# Altium PCB Pour Over 1 Final.PcbDoc
Units mil, origin at the board's own origin, x right, y up, seen from the top; angles counter-clockwise.
Board outline 6000 x 4000 mil, 4 copper layers (Top Layer, Mid Layer 1, Mid Layer 2, Bottom Layer), stack 23.756 mil thick; 46 components, 32 nets, 189 pads, 12 vias.
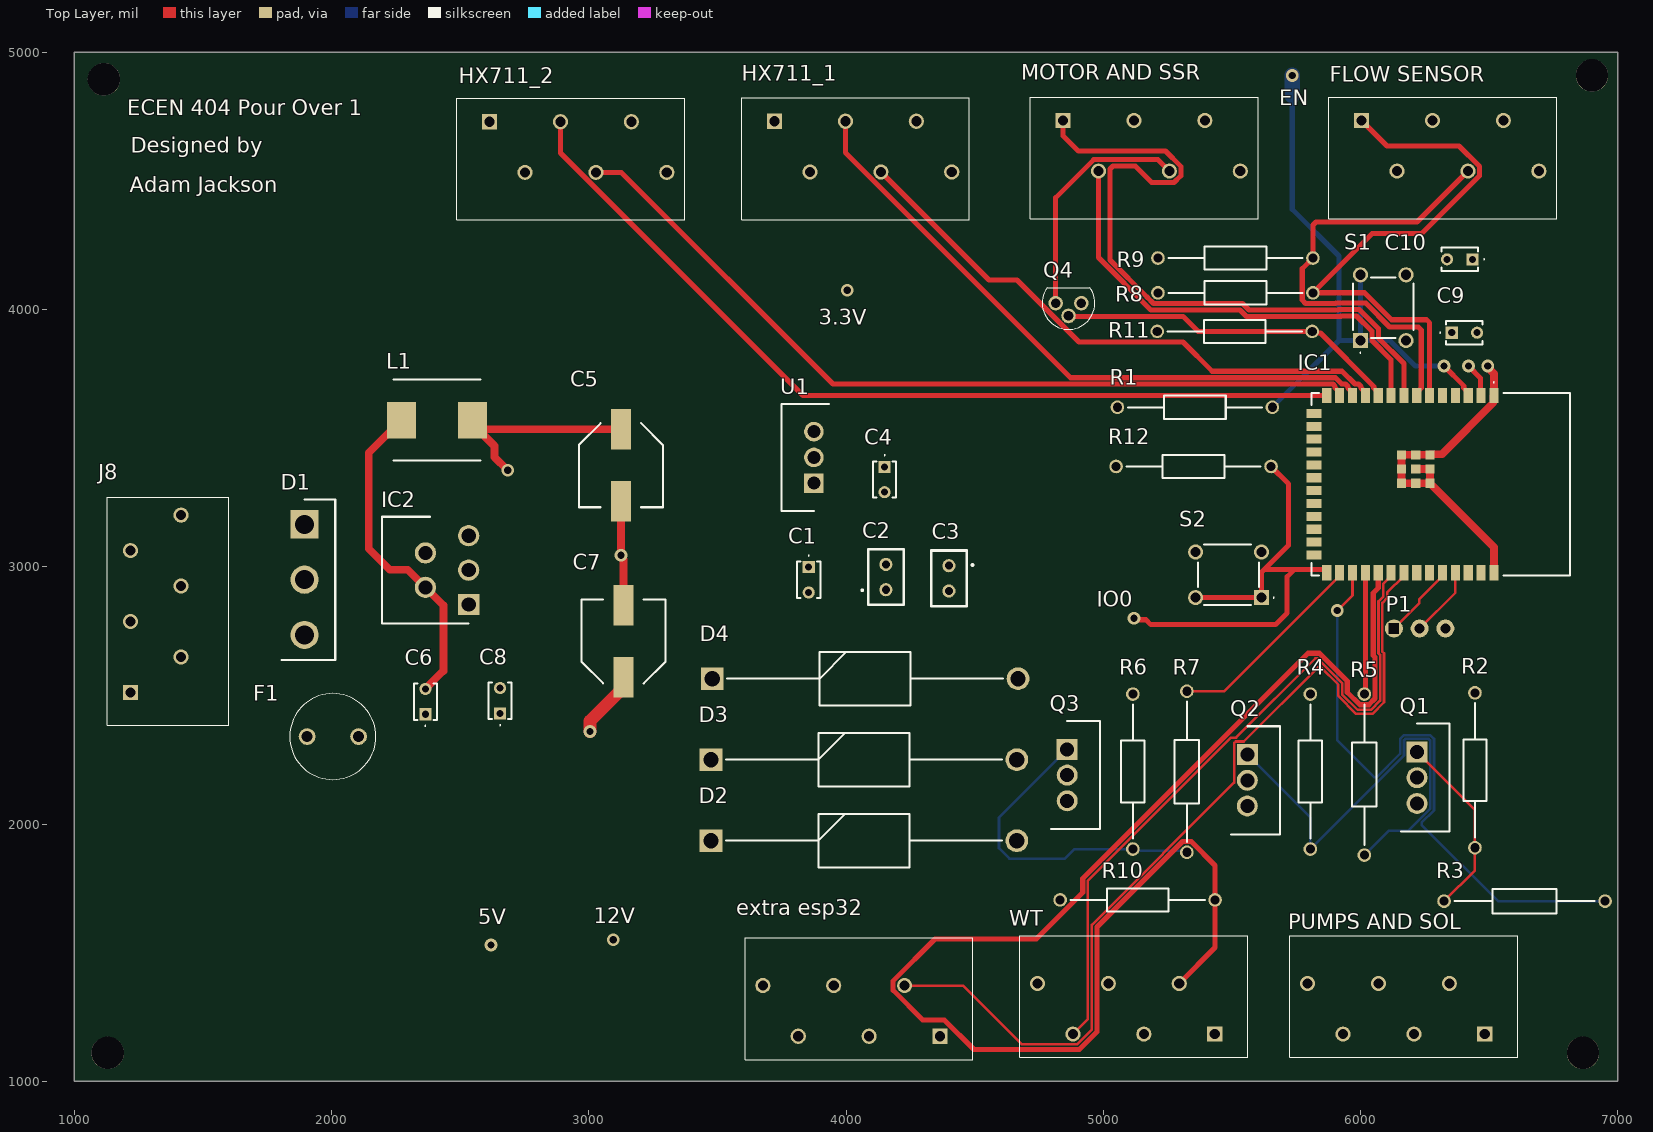
[diagram p0: Top Layer view]
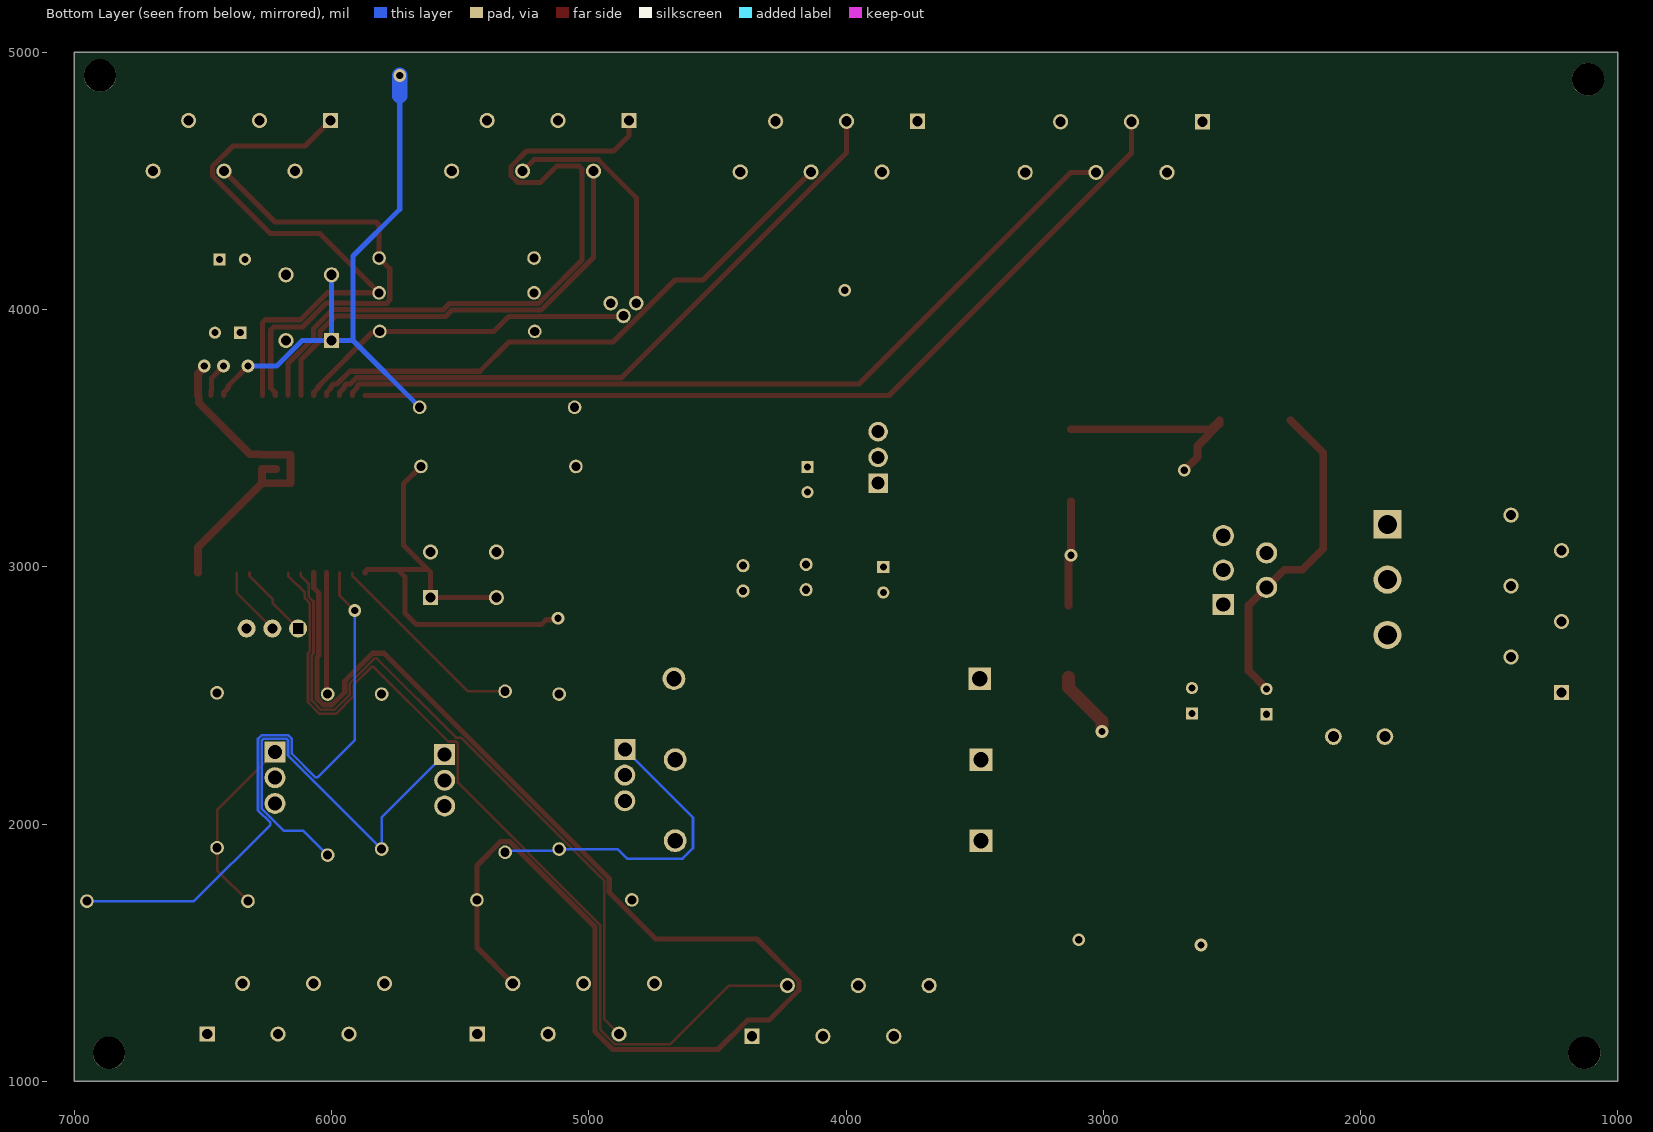
[diagram p1: Bottom Layer view, seen from below]
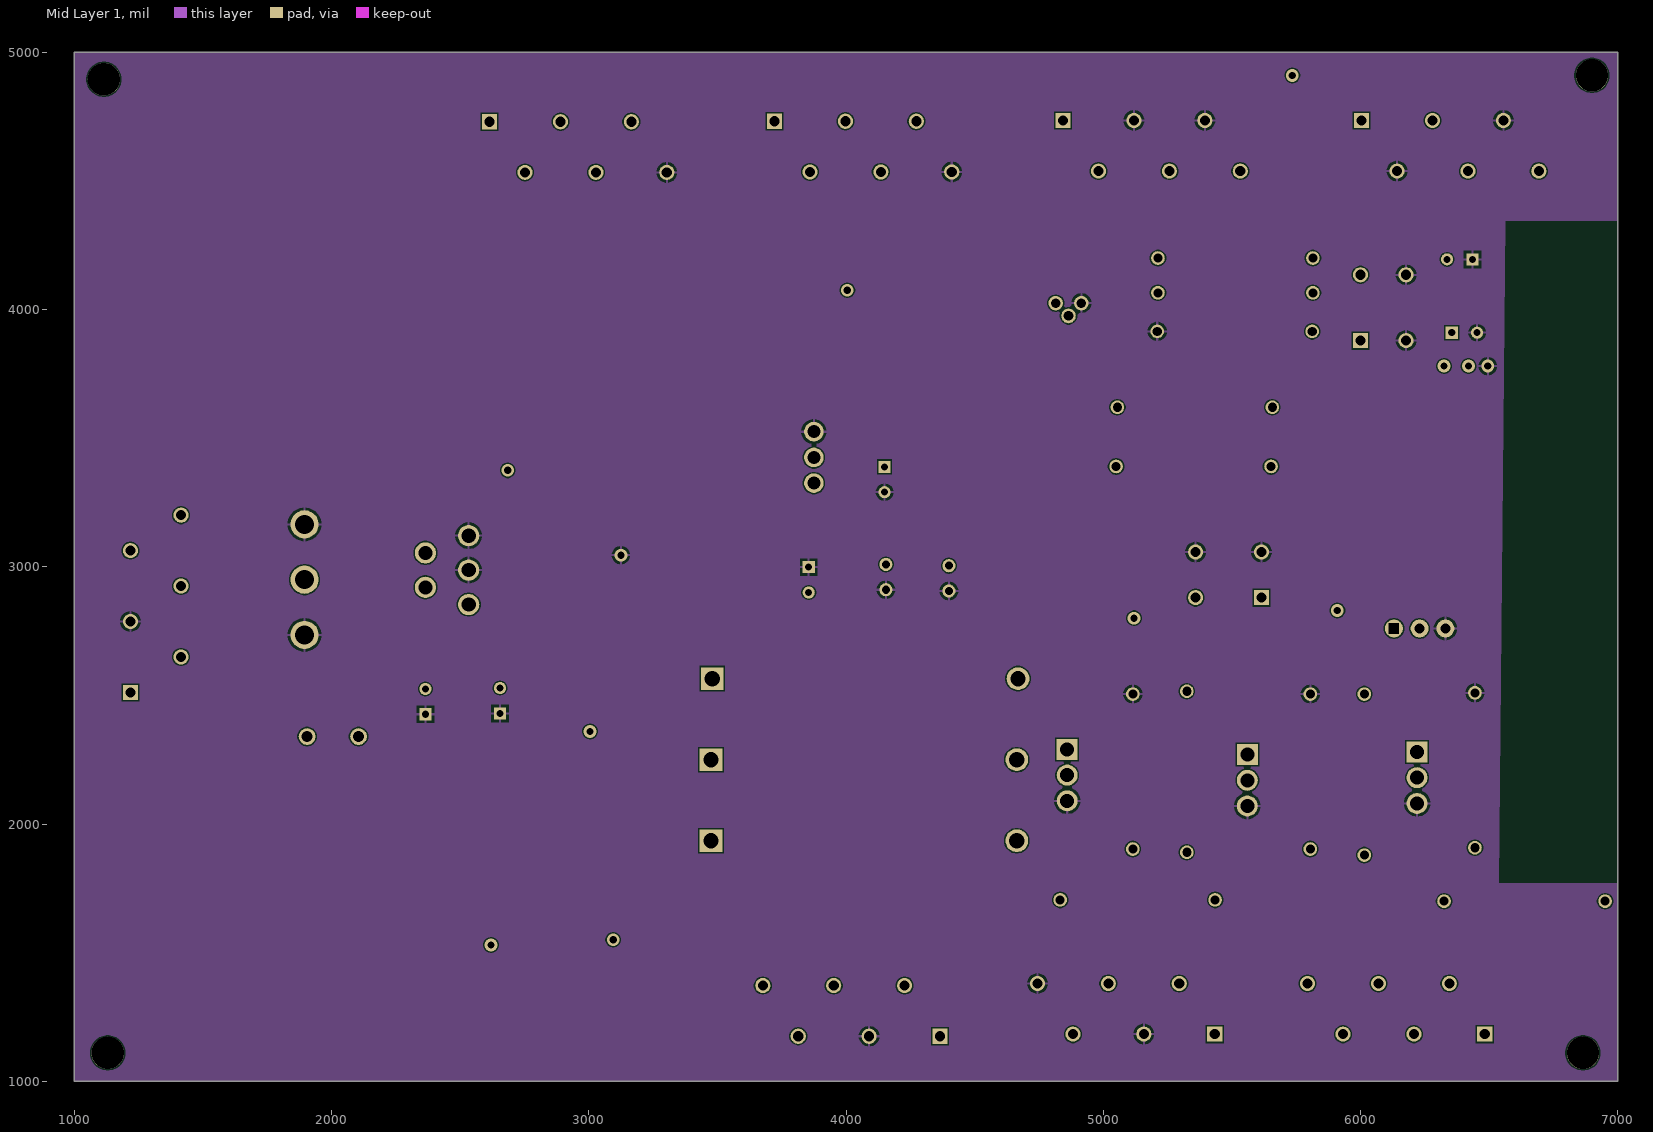
[diagram p2: Mid Layer 1]
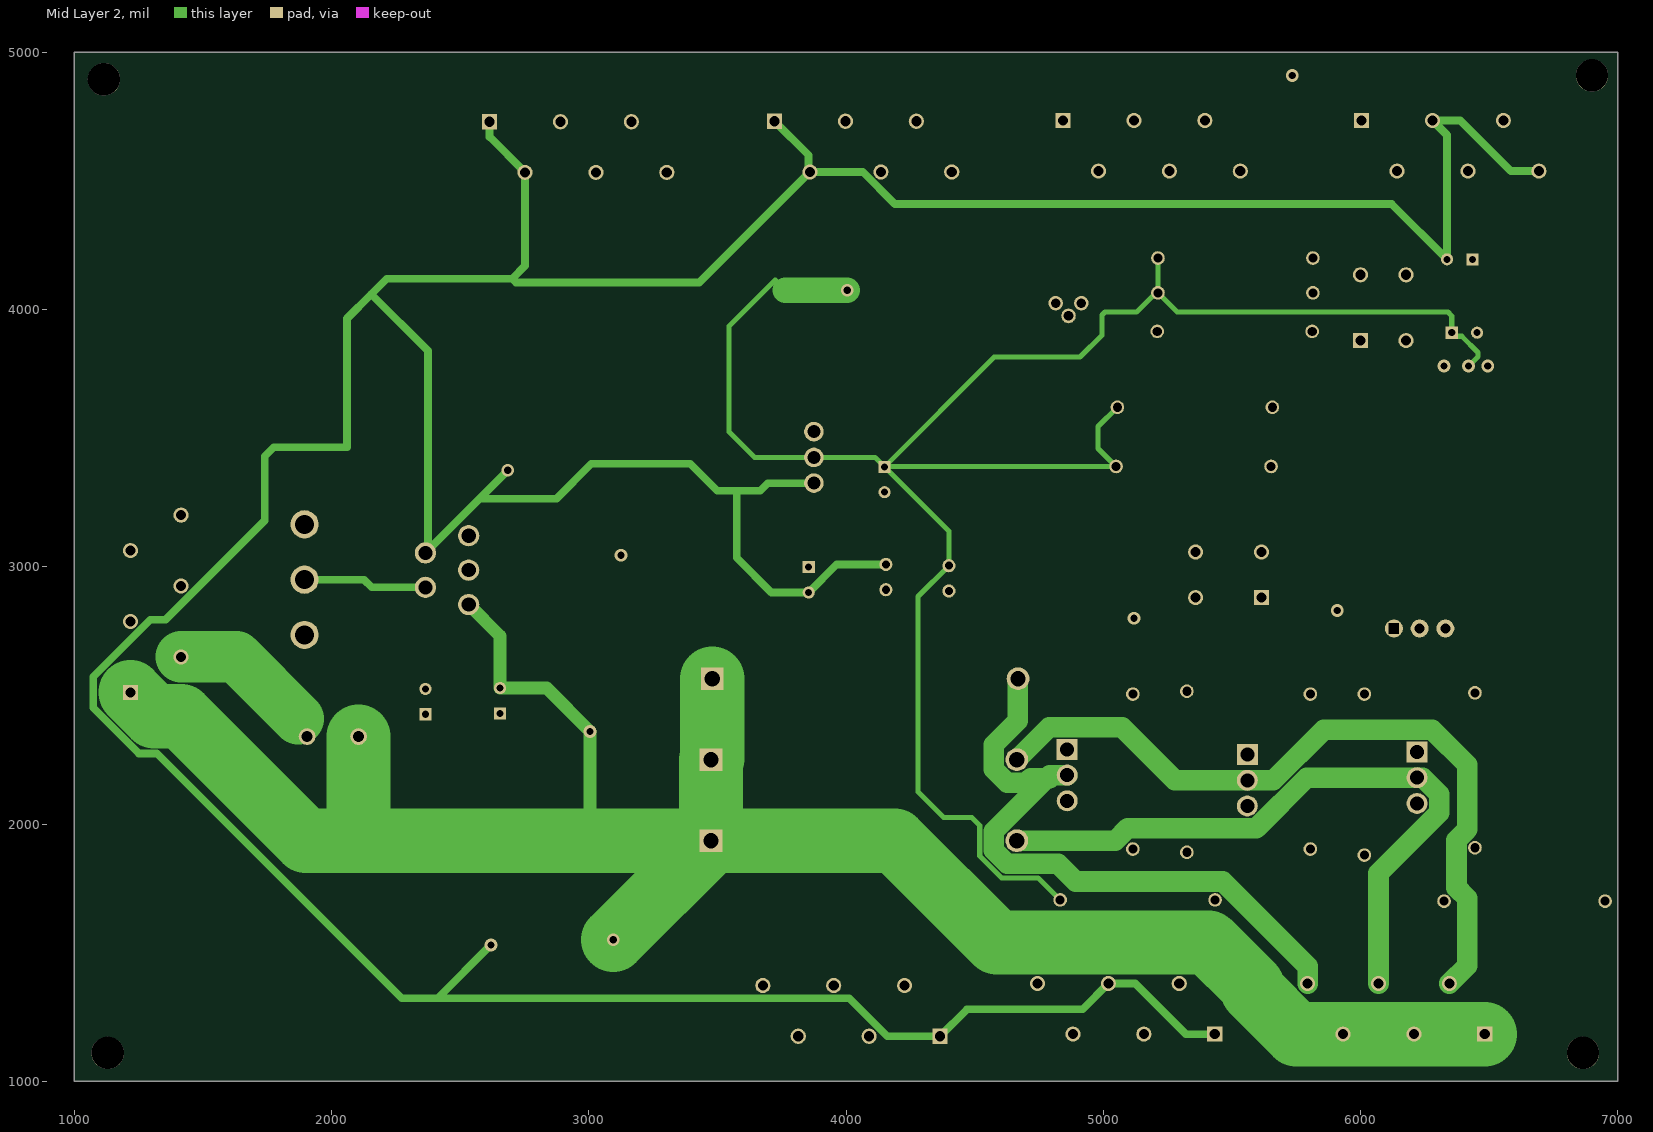
[diagram p3: Mid Layer 2]
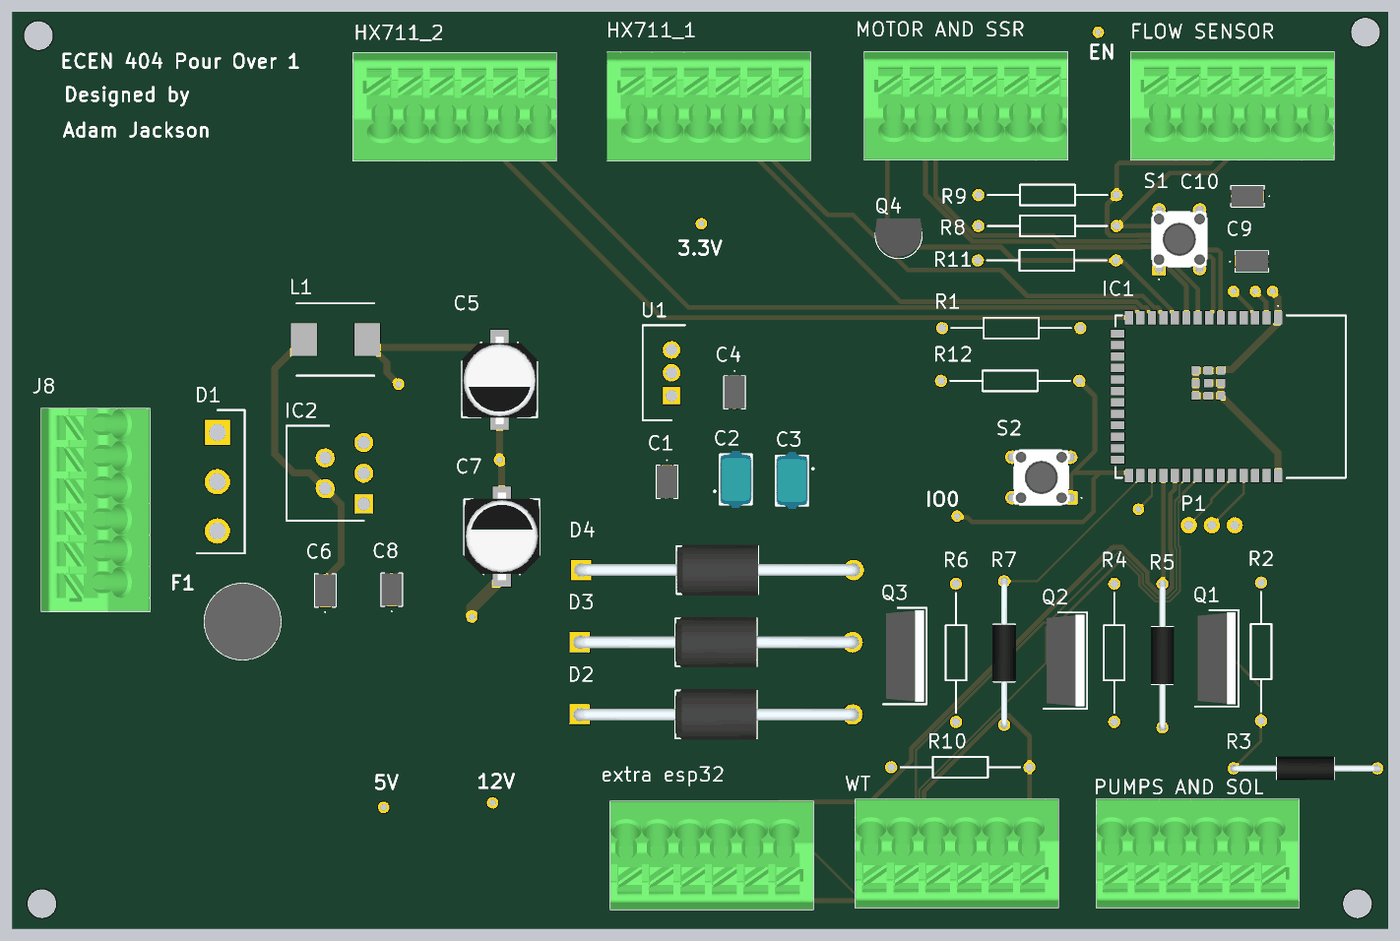
[diagram p4: 3D render of the assembled board from above, using the file's embedded part models]

## Layer stack, top to bottom
Top Solder: solder mask 0.4, Solder Resist, Dk 3.5
Top Layer: signal copper 1.4
Dielectric 2: prepreg 2.8, PP-006, Dk 4.1
Mid Layer 1: signal copper 1.378
Dielectric 1: dielectric 12.6, FR-4, Dk 4.8
Mid Layer 2: signal copper 1.378
Dielectric 3: prepreg 2.8, PP-006, Dk 4.1
Bottom Layer: signal copper 1.4
Bottom Solder: solder mask 0.4, Solder Resist, Dk 3.5

## Board outline
1000,1000 7000,1000 7000,5000 1000,5000

## Design rules (kind name [scope] priority, off if disabled: settings)
Clearance [All] p1: gap=5 ignorepadtopadclearanceinfootprint=FALSE
HoleSize [All] p1: absolutevalues=TRUE maxlimit=200 minlimit=1 maxpercent=80.000 minpercent=20.000
MinimumSolderMaskSliver [All] p1: minsoldermaskwidth=4
PolygonConnect [All] p1: connectstyle=Relief reliefconductorwidth=10 reliefentries=4 polygonreliefangle="90 Angle" airgapwidth=10
RoutingVias [All] p1: holewidth=28 width=50 viastyle="Through Hole" minholewidth=28 minwidth=50 maxholewidth=28 maxwidth=50
SilkToSolderMaskClearance [IsPad] p1: minsilkscreentomaskgap=2.01 clearancetoexposedcopper=TRUE
SolderMaskExpansion [All] p1: expansion=4 istentingtop=FALSE
SupplyNets "Schematic Supply Nets" [InNet('GND')] p1: voltage=0.000
Width [All] p1: maxlimit=250 minlimit=10 preferedwidth=10 minimp=50.000000 maximp=50.000000 favimp=50.000000
27 further rules are at their usual default settings.

## Components (designator, comment, footprint, x,y, rotation, side; value= is the part's Value field where it differs from the comment)
C1 "0.1 uF" K104K10X7RF5TL2 3855,2998.43 r270 top
C2 "10 uF" FG16 4155,2960 r90 top
C3 "10 uF" FG16 4400,2955 r270 top
C4 "0.1 uF" K104K10X7RF5TL2 4150,3388.43 r270 top
C5 "220 uF" EEHZT1E331UP 3125,3394.76 r270 top
C6 "0.1 uF" K104K10X7RF5TL2 2365,2426.57 r90 top
C7 "220 uF" EEHZT1E331UP 3135,2710 r90 top
C8 "0.1 uF" K104K10X7RF5TL2 2655,2430 r90 top
C9 "0.1 uF" K104K10X7RF5TL2 6355,3910 r0 top
C10 "0.1 uF" K104K10X7RF5TL2 6435,4195 r180 top
D1 "VS-40CPQ045-N3" TO546P531X1558X2499-3P 1895,3164.96 r270 top
D2 "1N5408" DIOAD3020W130L900D530 3475,1935 r0 top
D3 "1N5408" DIOAD3020W130L900D530 3475,2250 r0 top
D4 "1N5408" DIOAD3020W130L900D530 3480,2565 r0 top
"extra esp32" "1985234" 1985234 4365.59,1175 r180 top (schematic designator J7)
F1 "37214000411" 37214000411 1905,2340 r0 top
"FLOW SENSOR" "1985234" 1985234 6004.41,4735 r0 top (schematic designator J1)
HX711_1 "1985234" 1985234 3722.2,4731.85 r0 top (schematic designator J3)
HX711_2 "1985234" 1985234 2614.41,4730 r0 top (schematic designator J4)
IC1 "ESP32-S3-WROOM-1-N4" ESP32S3WROOM1N4 6302.01,3320.94 r270 top
IC2 "LM2596T-5.0_LF03" TO170P470X1028X2142-5P 2533.11,2853.07 r90 top
J8 "1985234" 1985234 1218.15,2511.61 r90 top
L1 "33 uH" INDPM8680X400N 2410,3570 r0 top
"MOTOR AND SSR" "1985234" 1985234 4843.82,4735 r0 top (schematic designator J2)
P1 "PREC003SAAN-RC" CONNECTOR 6230,2760 r0 top
"PUMPS AND SOL" "1985234" 1985234 6483.39,1183.15 r180 top (schematic designator J5)
Q1 "IRLB4132PBF" TO254P483X1016X1994-3P 6220,2280 r270 top
Q2 "IRLB4132PBF" TO254P483X1016X1994-3P 5560,2270 r270 top
Q3 "IRLB4132PBF" TO254P483X1016X1994-3P 4860,2290 r270 top
Q4 "2N7000" TO-92_(TO-226) 4915,4025 r0 top
R1 "4.7k" RESAD1526W69L610D229 5657.36,3620 r180 top
R2 "4.7k" RESAD1526W69L610D229 6445,2510 r270 top
R3 "100 ohm" RESAD1590W70L630D240 6950.98,1700 r180 top
R4 "4.7k" RESAD1526W69L610D229 5805,2505 r270 top
R5 "100 ohm" RESAD1590W70L630D240 6015,2505 r270 top
R6 "4.7k" RESAD1526W69L610D229 5115,2505 r270 top
R7 "100 ohm" RESAD1590W70L630D240 5325,2515.98 r270 top
R8 "4.7k" RESAD1526W69L610D229 5815,4065 r180 top
R9 "4.7k" RESAD1526W69L610D229 5815,4200 r180 top
R10 "4.7k" RESAD1526W69L610D229 5435,1705 r180 top
R11 "4.7k" RESAD1526W69L610D229 5812.36,3915 r180 top
R12 "4.7k" RESAD1526W69L610D229 5652.36,3390 r180 top
S1 "TS02-66-60-BK-260-SCR-D" TS026660BK260SCRD 6000,3879.09 r90 top
S2 "TS02-66-60-BK-260-SCR-D" TS026660BK260SCRD 5615,2880 r180 top
U1 "LMS1585ACT-3.3_NOPB" TO254P470X1028X1955-3P 3875,3325 r90 top
WT "1985234" 1985234 5433.39,1183.15 r180 top (schematic designator J6)

## Footprints (in the part's own frame and the unit in brackets; to place one, negate y for a bottom-side part, rotate by r counter-clockwise, add the part's x,y. Pads: shape width x height; smd on the part's side, far side on the other; paste and mask are expansions set on the pad)
1985234 [mm]
  rect 1.5x1.5 hole 1: 1(0,0)
  round 1.5 hole 1: 2(3.5,-5) 3(7,0) 4(10.5,-5) 5(14,0) 6(17.5,-5)
  silkscreen extent -3.25,-9.7 19.25,2.3, body extent -3.25,-9.7 19.25,2.3, height 13.1
37214000411 [mm]
  round 1.65 hole 1.1: 1(0,0) 2(5.08,0)
  silkscreen extent -1.71,-4.25 6.79,4.25, body extent -1.71,-4.24 6.79,4.24, height 8.1
CONNECTOR [mm]
  round 1.78 hole 1 square: 1(-2.54,0)
  round 1.78 hole 1: 2(0,0) 3(2.54,0)
DIOAD3020W130L900D530 [mm]
  rect 2.25x2.25 hole 1.5: 1(0,0)
  round 2.25 hole 1.5: 2(30.2,0)
  silkscreen extent 1.48,-2.65 28.72,2.65, body extent -0.65,-2.79 30.85,2.79, height 5.6
EEHZT1E331UP [mm]
  rect 4x2 smd: 1(-3.55,0) 2(3.55,0)
  silkscreen extent -4.15,-4.15 4.15,4.15, body extent -4.79,-4.15 4.91,4.15, height 10.2
ESP32S3WROOM1N4 [mm]
  rect 1.5x0.9 smd: 1(-8.75,5.51) 2(-8.75,4.24) 3(-8.75,2.97) 4(-8.75,1.7) 5(-8.75,0.43) 6(-8.75,-0.84) 7(-8.75,-2.11) 8(-8.75,-3.38) 9(-8.75,-4.65) 10(-8.75,-5.92) 11(-8.75,-7.19) 12(-8.75,-8.46) 13(-8.75,-9.73) 14(-8.75,-11) 27(8.75,-11) 28(8.75,-9.73) 29(8.75,-8.46) 30(8.75,-7.19) 31(8.75,-5.92) 32(8.75,-4.65) 33(8.75,-3.38) 34(8.75,-2.11) 35(8.75,-0.84) 36(8.75,0.43) 37(8.75,1.7) 38(8.75,2.97) 39(8.75,4.24) 40(8.75,5.51)
  rect 0.9x1.5 smd: 15(-6.985,-12.25) 16(-5.715,-12.25) 17(-4.445,-12.25) 18(-3.175,-12.25) 19(-1.905,-12.25) 20(-0.635,-12.25) 21(0.635,-12.25) 22(1.905,-12.25) 23(3.175,-12.25) 24(4.445,-12.25) 25(5.715,-12.25) 26(6.985,-12.25)
  rect 0.9x0.9 smd: 41(-1.5,-2.21) 42(-0.1,-2.21) 43(-0.1,-0.81) 44(-1.5,-0.81) 45(-2.9,-0.81) 46(-2.9,-2.21) 47(-2.9,-3.61) 48(-1.5,-3.61) 49(-0.1,-3.61)
  silkscreen extent -10.1,-12.5 9,13
FG16 [mm]
  round 1.3 hole 0.8: 1(-1.25,0) 2(1.25,0)
  silkscreen extent -2.75,-1.75 2.75,2.39, body extent -3.16,-1.75 3.16,1.75, height 6.44
INDPM8680X400N [mm]
  rect 2.85x3.6 smd: 1(-3.5,0) 2(3.5,0)
  silkscreen extent -4.3,-4 4.3,4
K104K10X7RF5TL2 [mm]
  rect 1.2x1.2 hole 0.7: 1(0,0)
  round 1.2 hole 0.7: 2(2.5,0)
  silkscreen extent -1.2,-1.15 3.05,1.15, body extent -0.55,-1.15 3.05,1.15, height 5.3
RESAD1526W69L610D229 [mm]
  round 1.35 hole 0.9: 1(0,0) 2(15.3,0)
  silkscreen extent 1.02,-1.14 14.28,1.14
RESAD1590W70L630D240 [mm]
  round 1.35 hole 0.9: 1(0,0) 2(15.9,0)
  silkscreen extent 1.02,-1.2 14.87,1.2, body extent -0.35,-1.29 16.25,1.29, height 2.6
TO170P470X1028X2142-5P [mm]
  rect 2.1x2.1 / inner round 2.1 / far side rect 2.1x2.1 hole 1.4: 1(0,0)
  round 2.1 hole 1.4: 2(1.7,4.27) 3(3.4,0) 4(5.1,4.27) 5(6.8,0)
  silkscreen extent -1.87,0 8.67,8.53
TO254P470X1028X1955-3P [mm]
  rect 1.935x1.935 / inner round 1.935 / far side rect 1.935x1.935 hole 1.29: 1(0,0)
  round 1.935 hole 1.29: 2(2.54,0) 3(5.08,0)
  silkscreen extent -2.73,-1.5 7.81,3.2
TO254P483X1016X1994-3P [mm]
  rect 2.07x2.07 hole 1.38: 1(0,0)
  round 2.07 hole 1.38: 2(2.54,0) 3(5.08,0)
  silkscreen extent -2.8,-1.61 7.88,3.22, body extent -2.54,-1.28 7.62,2.91, height 20.74
TO546P531X1558X2499-3P [mm]
  rect 2.79x2.79 / inner round 2.79 / far side rect 2.79x2.79 hole 1.86: 1(0,0)
  round 2.79 hole 1.86: 2(5.46,0) 3(10.92,0)
  silkscreen extent -2.47,-2.27 13.39,3.04
TO-92_(TO-226) [mm]
  round 1.44 hole 0.94: 1(0,0) 2(-1.27,-1.27) 3(-2.54,0)
  silkscreen extent -3.87,-2.6 1.33,1.53, body extent -3.87,-2.35 1.33,1.84, height 5.58
TS026660BK260SCRD [mm]
  rect 1.5x1.5 hole 1: 1(0,0)
  round 1.5 hole 1: 2(6.5,0) 3(0,-4.5) 4(6.5,-4.5)
  silkscreen extent -1.25,-5.25 6.25,0.75, body extent -0.35,-5.25 6.85,0.75, height 6.02

## Part data
C1 C4 C6 C8 C9 C10: library part K104K10X7RF5TL2, "Capacitor", Manufacturer_Name=Vishay, Mouser Part Number=594-K104K10X7RF5TL2, Arrow Part Number=K104K10X7RF5TL2, Arrow Price/Stock=https://www.arrow.com/en/products/k104k10x7rf5tl2/vishay?region=nac, Datasheet Link=https://www.vishay.com/docs/45171/kseries.pdf, Height=5.2mm, Manufacturer_Part_Number=K104K10X7RF5TL2, Mouser Price/Stock=https://www.mouser.co.uk/ProductDetail/Vishay-BC-Components/K104K10X7RF5TL2?qs=B4Lc6Tv24tbCh1UvC16VNg%3D%3D
C2 C3: library part FG16X7R1E106KRT06, "Capacitor", Manufacturer_Name=TDK, Mouser Part Number=810-FG16X7R1E106KRT6, Arrow Part Number=FG16X7R1E106KRT06, Arrow Price/Stock=https://www.arrow.com/en/products/fg16x7r1e106krt06/tdk, Datasheet Link=https://product.tdk.com/system/files/dam/doc/product/capacitor/ceramic/lead-mlcc/catalog/leadmlcc_halogenfree_fg_en.pdf, Height=5.5mm, Manufacturer_Part_Number=FG16X7R1E106KRT06, Mouser Price/Stock=https://www.mouser.co.uk/ProductDetail/TDK/FG16X7R1E106KRT06?qs=qf2ddTMq67V1hYQaidv4ew%3D%3D
C5 C7: library part EEE-TP1C221AP, "Capacitor Polarised", Manufacturer_Name=Panasonic, Mouser Part Number=667-EEE-TP1C221AP, Datasheet Link=http://industrial.panasonic.com/cdbs/www-data/pdf/RDE0000/ABA0000C1196.pdf, Height=10.8mm, Manufacturer_Part_Number=EEE-TP1C221AP, Mouser Price/Stock=https://www.mouser.com/Search/Refine.aspx?Keyword=667-EEE-TP1C221AP
D1: "Diode", Manufacturer_Name=Vishay, Mouser Part Number=78-VS-40CPQ045-N3, Datasheet Link=https://www.vishay.com/docs/96456/vs-40cpq-n3series.pdf, Height=5.31mm, Manufacturer_Part_Number=VS-40CPQ045-N3, Mouser Price/Stock=https://www.mouser.com/Search/Refine.aspx?Keyword=78-VS-40CPQ045-N3
D2 D3 D4: "Diode", Manufacturer_Name="HY Electronic", Datasheet Link=http://uk.rs-online.com/web/p/products/9033315, Manufacturer_Part_Number=1N5408
"extra esp32" "FLOW SENSOR" HX711_1 HX711_2 J8 "MOTOR AND SSR" "PUMPS AND SOL" WT: "Connector", Manufacturer_Name="Phoenix Contact", Mouser Part Number=651-1985234, Arrow Part Number=1985234, Arrow Price/Stock=https://www.arrow.com/en/products/1985234/phoenix-contact.html?utm_currency=USD&region=nac, Datasheet Link=https://www.phoenixcontact.com/en-us/products/printed-circuit-board-terminal-ptsa-15-6-35-z-1985234?type=pdf, Height=13.1mm, Manufacturer_Part_Number=1985234, Mouser Price/Stock=https://www.mouser.co.uk/ProductDetail/Phoenix-Contact/1985234?qs=A%2FKWGUWTCZgjCof%252B1YY92w%3D%3D
F1: "Fuse", Manufacturer_Name=LITTELFUSE, Mouser Part Number=576-37214000411, Arrow Part Number=37214000411, Arrow Price/Stock=https://www.arrow.com/en/products/37214000411/littelfuse.html?utm_currency=USD&region=europe, Datasheet Link=https://componentsearchengine.com/Datasheets/1/37214000411.pdf, Height=8mm, Manufacturer_Part_Number=37214000411, Mouser Price/Stock=https://www.mouser.com/Search/Refine.aspx?Keyword=576-37214000411
IC1: "Integrated Circuit", Manufacturer_Name="Espressif Systems", Mouser Part Number=356-ESP32-S3WROOM1N4, Datasheet Link=https://www.espressif.com/sites/default/files/documentation/esp32-s3-wroom-1_wroom-1u_datasheet_en.pdf, Height=3.25mm, Manufacturer_Part_Number=ESP32-S3-WROOM-1-N4, Mouser Price/Stock=https://www.mouser.co.uk/ProductDetail/Espressif-Systems/ESP32-S3-WROOM-1-N4?qs=Li%252BoUPsLEnsO%2FkiJOUK0FQ%3D%3D
IC2: "Integrated Circuit", Arrow Part Number=LM2596T-5.0/LF03, Manufacturer_Name="Texas Instruments", Mouser Part Number=926-LM2596T-50/LF03, Arrow Price/Stock=https://www.arrow.com/en/products/lm2596t-5.0lf03/texas-instruments?utm_currency=USD&region=nac, Datasheet Link=https://www.ti.com/lit/ds/symlink/lm2596.pdf?ts=1607069798907&ref_url=https%253A%252F%252Fwww.ti.com%252Fstore%252Fti%252Fen%252Fp%252Fproduct%252F%253Fp%253DLM2596T-5.0%252FLF03%2526keyMatch%253DLM2596T-5.0%252FLF03%2526tisearch%253DSearch-EN-everything%, Height=4.7mm, Manufacturer_Part_Number=LM2596T-5.0/LF03, Mouser Price/Stock=https://www.mouser.co.uk/ProductDetail/Texas-Instruments/LM2596T-5.0-LF03?qs=X1J7HmVL2ZG6KM98hB9zGA%3D%3D
L1: library part F1F2-0804-330M, "Inductor", Manufacturer_Name=Bel, Datasheet Link=https://www.mouser.in/datasheet/3/191/1/ds-ST-F1F2-0804-series.pdf, Height=4mm, Manufacturer_Part_Number=F1F2-0804-330M
P1: "ESP32 USB Connector"
Q1 Q2 Q3: "MOSFET (N-Channel)", Manufacturer_Name=Infineon, Mouser Part Number=942-IRLB4132PBF, Arrow Part Number=IRLB4132PBF, Arrow Price/Stock=https://www.arrow.com/en/products/irlb4132pbf/infineon-technologies-ag.html?utm_currency=USD&region=nac, Datasheet Link=https://4donline.ihs.com/images/VipMasterIC/IC/INFN/INFN-S-A0008993592/INFN-S-A0008993592-1.pdf?hkey=6D3A4C79FDBF58556ACFDE234799DDF0, Height=4.83mm, Manufacturer_Part_Number=IRLB4132PBF, Mouser Price/Stock=https://www.mouser.co.uk/ProductDetail/Infineon-Technologies/IRLB4132PBF?qs=7jf4hlN%252BSJAw3gjmC05T%2Fw%3D%3D
Q4: "MOSFET (N-Channel)", Manufacturer_Name=onsemi, Mouser Part Number=512-2N7000, Arrow Part Number=2N7000, Arrow Price/Stock=https://www.arrow.com/en/products/2n7000/on-semiconductor.html?utm_currency=USD&region=europe, Datasheet Link=https://www.onsemi.com/pub/Collateral/NDS7002A-D.PDF, Height=5.33mm, Manufacturer_Part_Number=2N7000, Mouser Price/Stock=https://www.mouser.co.uk/ProductDetail/onsemi-Fairchild/2N7000?qs=FOlmdCx%252BAA2o%2FKZOTk%2F3hg%3D%3D
R1 R2 R4 R6 R8 R9 R10 R11 R12: library part RN55E4701BRE6, "Resistor", Manufacturer_Name=Vishay, Datasheet Link=https://www.vishay.com/docs/31027/cmfmil.pdf, Manufacturer_Part_Number=RN55E4701BRE6
R3 R5 R7: library part MFP-25BRD52-100R, "Resistor", Manufacturer_Name="Yageo Group", Mouser Part Number=603-MFP-25BRD52-100R, Arrow Part Number=MFP-25BRD52-100R, Arrow Price/Stock=https://www.arrow.com/en/products/mfp-25brd52-100r/yageo, Datasheet Link=https://www.yageo.com/upload/media/product/productsearch/datasheet/lr/YAGEO%20MFP_datasheet_2021v0.pdf, Manufacturer_Part_Number=MFP-25BRD52-100R, Mouser Price/Stock=https://www.mouser.co.uk/ProductDetail/YAGEO/MFP-25BRD52-100R?qs=lfEcNZWccVkSKxBYlhOoug%3D%3D
S1 S2: "Switch", Manufacturer_Name="Same Sky", Mouser Part Number=179-TS026660BK260SCR, Arrow Part Number=TS02-66-60-BK-260-SCR-D, Arrow Price/Stock=https://www.arrow.com/en/products/ts02-66-60-bk-260-scr-d/cui-devices?region=nac, Datasheet Link=https://www.sameskydevices.com/product/resource/ts02.pdf, Height=6.2mm, Manufacturer_Part_Number=TS02-66-60-BK-260-SCR-D, Mouser Price/Stock=https://www.mouser.co.uk/ProductDetail/CUI-Devices/TS02-66-60-BK-260-SCR-D?qs=A6eO%252BMLsxmSDYX3TQ5KZSA%3D%3D
U1: "Undefined or Miscellaneous", Arrow Part Number=LMS1585ACT-3.3/NOPB, Manufacturer_Name="Texas Instruments", Mouser Part Number=926-LMS1585ACT33NOPB, Arrow Price/Stock=https://www.arrow.com/en/products/lms1585act-3.3nopb/texas-instruments?region=nac, Datasheet Link=http://www.ti.com/lit/gpn/lms1585a, Height=4.7mm, Manufacturer_Part_Number=LMS1585ACT-3.3/NOPB, Mouser Price/Stock=https://www.mouser.co.uk/ProductDetail/Texas-Instruments/LMS1585ACT-3.3-NOPB?qs=7lkVKPoqpbYfezQINhjreg%3D%3D

## Free pads (board coordinates)
  round 126 hole 126 unplated: MOUNT1(1115,4895) MOUNT2(6900,4910) MOUNT3(1130,1110) MOUNT4(6865,1110)

## Via types
v1: diameter 50, hole 28, Top Layer to Bottom Layer, 12 vias

## Nets (pads, with @x,y where several pads share a name; then routed paths per layer and width w, separated by ;. In a path a pad name is that pad's centre, name@x,y a point inside that pad or via, vN(x,y) a via of type N, cw(c..) or ccw(c..) an arc to the next point about the centre after c; other vN are vias at no path point)
12_IN: "PUMPS AND SOL.1" "PUMPS AND SOL.3" "PUMPS AND SOL.5" C7.1 C8.2 D2.1 D3.1 D4.1 F1.2 IC2.1 J8.1 | length 8891.8
  Top Layer w50: v1(3005,2360) 3005,2400.87 3135,2530.87 C7.1
  Mid Layer 2 w50: IC2.1 2655,2731.18 C8.2 2836.57,2528.43 v1(3005,2360) 3005,1935
  Mid Layer 2 w250: J8.1 1310.35,2419.41 1415.59,2419.41 1900,1935 2095,1935 ; F1.2 2105,1945 2095,1935 ; v1(3095,1550) 3475,1930 D2.1 ; D4.1 3480,2255 D3.1 D2.1 ; 6483.39,1183.15 6207.8,1183.15 5750.84,1183.15 5580.06,1353.93 5580.06,1368.74 5409.28,1539.53 4585.47,1539.53 4190,1935 D2.1 ; 2095,1935 3005,1935 D2.1
+3.3V: C3.1 C4.1 C9.1 IC1.2 R1.2 R8.2 R9.2 R10.2 R12.2 U1.2 | length 8111.4
  Top Layer w20: v1(6420,3780) 6466.92,3733.08 6466.92,3684.96 6468.94,3682.95 IC1.2
  Mid Layer 2 w20: 3765,4075 3725,4115 3545,3935 3545,3525 3645,3425 U1.2 4113.43,3425 C4.1 ; R10.2 4746.93,1790.71 4604.21,1790.71 4519.69,1875.23 4519.69,1994.51 4489.2,2025 4380,2025 4280,2125 4280,2884.21 C3.1 4400,3138.43 C4.1 ; R1.2 4980,3545 4980,3460 R12.2 5049.21,3389.21 C4.1@4150.79,3389.21 ; R9.2 R8.2 ; C9.1 6355,3975 6340,3990 5287.64,3990 R8.2 ; C9.1@6368.62,3896.38 6393.62,3896.38 6456.72,3833.28 6456.72,3816.72 v1(6420,3780) ; C4.1 C4.1@4150.79,3389.21 ; C4.1@4150.79,3389.21 4576.57,3815 4910,3815 4995,3900 4995,3978.28 5006.72,3990 5130,3990 5205,4065 R8.2
  Mid Layer 2 w100: 3765,4075 v1(4005,4075)
+5V: "extra esp32.1" "FLOW SENSOR.3" "FLOW SENSOR.6" C1.2 C2.2 C5.1 C10.2 HX711_1.1 HX711_1.2 HX711_2.1 HX711_2.2 IC2.4 L1.2 U1.1 WT.1 WT.4 | length 18875.5
  Top Layer w30: v1(2685,3375) 2633.68,3426.32 2633.68,3469.35 2547.8,3555.24 L1.2 2583.27,3534.53 C5.1
  Mid Layer 2 w30: IC2.4 2375,3063.86 IC2.4@2375,3064.43 ; HX711_2.1 2614.41,4670.94 HX711_2.2 2752.2,4169.78 2702.43,4120 ; v1(2620,1530) 2412.32,1322.32 ; v1(2685,3375) 2685,3374.43 2575.29,3264.71 ; HX711_1.1 3854.44,4599.61 3854.44,4540.56 HX711_1.2 ; U1.1 3696.25,3325 3666.25,3295 3575,3295 ; C2.2 3964.21,3009.21 C1.2 3710,2900 3575,3035 3575,3295 ; WT.1 5321.79,1183.15 5124.94,1380 WT.4 4920,1280 4470.59,1280 4365.59,1175 4160.04,1175 4012.72,1322.32 2412.32,1322.32 ; 6693.39,4538.15 6585.12,4538.15 6388.27,4735 6280,4735 6336.57,4678.43 C10.2 6121.57,4410 4190.55,4410 4065.55,4535 HX711_1.2 ; 2155,4060 2375,3840 IC2.4@2375,3064.43 ; 2155,4060 2060,3965 2060,3465 1775,3465 1740,3430 1740,3179.96 1354.45,2794.41 1295.88,2794.41 1073.15,2571.68 1073.15,2451.55 1250.29,2274.41 1321,2274.41 2273.09,1322.32 2412.32,1322.32 ; 2155,4060 2215,4120 2702.43,4120 ; IC2.4@2375,3064.43 2575.29,3264.71 ; 2575.29,3264.71 2874.71,3264.71 3010,3400 3395,3400 3500,3295 3575,3295 ; 2702.43,4120 2717.43,4105 3430,4105 HX711_1.2
FLOW1: "FLOW SENSOR.1" IC1.6 R8.1 | length 2189.5
  Top Layer w20: 6004.41,4735 6103.38,4636.03 6382.88,4636.03 6462.32,4556.59 6462.32,4519.71 6238.14,4295.52 6045.52,4295.52 R8.1 6015.71,4065 6120.71,3960 6257.22,3960 6268.94,3948.28 IC1.6
FLOW2: "FLOW SENSOR.4" IC1.7 R9.1 | length 1773
  Top Layer w20: IC1.7 6218.94,3677.24 6236.22,3694.53 6236.22,3920.51 6224.5,3932.22 6113.13,3932.22 6020.36,4025 5904.32,4025 5902.75,4023.43 5786.72,4023.43 5773.43,4036.72 5773.43,4158.43 R9.1 5815,4328.28 5826.72,4340 6219.65,4340 6417.8,4538.15
GND: "extra esp32.3" "FLOW SENSOR.2" "FLOW SENSOR.5" "MOTOR AND SSR.3" "MOTOR AND SSR.5" C1.1 C2.1 C3.2 C4.2 C5.2 C6.1 C7.2 C8.1 C9.2 C10.1 D1.1 D1.3 HX711_1.6 HX711_2.6 IC1.1 IC1.40 IC1.41 IC1.42 IC1.43 IC1.44 IC1.45 IC1.46 IC1.47 IC1.48 IC1.49 IC2.3 IC2.5 J8.3 P1.3 Q1.3 Q2.3 Q3.3 Q4.1 R2.1 R4.1 R6.1 R11.2 S1.3 S1.4 S2.3 S2.4 U1.3 WT.3 WT.6 | length 1785.5
  Top Layer w30: C5.2 v1(3125,3045) 3125,3039.59 3135,3029.59 C7.2 ; IC1.41 IC1.44 IC1.43 ; v1(6495,3780) 6495,3774.59 6518.94,3750.65 IC1.1 6516.22,3662.72 6516.22,3637.19 6316.87,3437.83 6272.83,3437.83 IC1.45 IC1.46 IC1.47 IC1.48 IC1.49 IC1.42 IC1.43 ; IC1.40 6518.94,3076.06 IC1.43
HX711_ADC1: HX711_1.4 IC1.11 | length 2254.3
  Top Layer w20: HX711_1.4 4556.24,4114.35 4664.35,4114.35 4905.27,3873.43 5310.37,3873.43 5423.83,3759.96 5928.22,3759.96 5978.22,3709.96 5992.87,3709.96 6001.65,3701.17 6001.65,3694.53 6018.94,3677.24 IC1.11
HX711_ADC2: HX711_2.4 IC1.13 | length 3261.4
  Top Layer w20: HX711_2.4 3126.12,4533.15 3949.31,3709.96 5892.87,3709.96 5901.65,3701.17 5901.65,3694.53 5918.94,3677.24 IC1.13
HX711_CLK1: HX711_1.3 IC1.12 | length 2495.2
  Top Layer w20: HX711_1.3 3997.8,4609.82 4872.66,3734.96 5903.22,3734.96 5927.13,3711.05 5941.78,3711.05 5951.65,3701.17 5951.65,3694.53 5968.94,3677.24 IC1.12
HX711_CLK2: HX711_2.3 IC1.14 | length 3491.4
  Top Layer w20: HX711_2.3 2890,4607.97 3832.54,3665.43 IC1.14
MOTOR_DIR: "MOTOR AND SSR.1" IC1.8 | length 2731.4
  Top Layer w20: 4843.82,4735 4843.82,4675.47 4903.26,4616.03 5242.29,4616.03 5301.73,4556.59 5301.73,4519.71 5275.65,4493.62 5188.78,4493.62 5124.73,4557.68 5037.86,4557.68 5026.14,4545.96 5026.14,4193.01 5171.06,4048.09 5171.06,4047.78 5195.42,4023.43 5541.76,4023.43 5566.76,3998.43 5913.1,3998.43 5914.68,4000 5995.36,4000 6069.53,3925.83 6069.53,3889.84 6168.94,3790.43 IC1.8
MOTOR_PWM: "MOTOR AND SSR.2" IC1.9 | length 1800
  Top Layer w20: 4981.61,4538.15 4981.61,4201.87 5185.06,3998.43 5531.4,3998.43 5556.4,3973.43 5923.46,3973.43 5925.03,3975 5985,3975 6044.53,3915.47 6044.53,3879.48 6118.94,3805.07 IC1.9
NetC6_2: C6.2 D1.2 IC2.2 L1.1 | length 1770.2
  Top Layer w30: L1.1 2145,3442.8 2145,3070 2226.17,2988.83 2296.17,2988.83 IC2.2 2435,2850 2435,2595 C6.2
  Mid Layer 2 w30: D1.2 2126.31,2950 2156.31,2920 IC2.2
NetF1_1: F1.1 J8.2 | length 554.2
  Mid Layer 2 w200: J8.2 1630.59,2649.41 1870,2410
NetIC1_3: IC1.3 R1.1 S1.1 S1.2 | length 2331.5
  Top Layer w20: v1(6325,3780) 6401.65,3703.35 6401.65,3694.53 6418.94,3677.24 IC1.3
  Bottom Layer w20: R1.1 5916.46,3879.09 ; 5735,4830 5735,4390 5916.46,4208.54 5916.46,3879.09 ; S1.2 S1.1 ; v1(6325,3780) 6213.29,3780 6114.19,3879.09 S1.1 ; 5916.46,3879.09 S1.1
  Bottom Layer w60: 5735,4830 v1(5735,4910)
NetIC1_27: IC1.27 R12.1 S2.1 S2.2 | length 1894.7
  Top Layer w20: v1(5120,2800) 5125.74,2794.26 5165.74,2794.26 5185,2775 5670,2775 5715,2820 5715,2961.03 5743.97,2990 ; S2.2 S2.1 5615,2978.28 5626.72,2990 ; R12.1 5720,3322.36 5720,3083.28 5626.72,2990 ; IC1.27 5868.94,2982.28 5861.22,2990 5743.97,2990 ; 5626.72,2990 5743.97,2990
NetIC1_36: IC1.36 P1.1 | length 294.7
  Top Layer w10: P1.1 6227.92,2857.92 6227.92,2873.63 6318.94,2964.65 IC1.36
NetIC1_37: IC1.37 P1.2 | length 274
  Top Layer w10: P1.2 6368.94,2898.94 IC1.37
NetQ1_1: Q1.1 R2.2 R3.2 | length 722.9
  Top Layer w10: Q1.1 6445,2055 R2.2 6445,1820 R3.2
NetQ2_1: Q2.1 R4.2 R5.2 | length 1744.5
  Bottom Layer w10: Q2.1 5805,2025 R4.2 6169.25,2266.89 6169.25,2324.89 6175.11,2330.75 6264.89,2330.75 6270.75,2324.89 6270.75,2058.98 6184.89,1973.13 6109.11,1973.13 R5.2
NetQ3_1: Q3.1 R6.2 R7.2 | length 1261.3
  Bottom Layer w10: Q3.1 4594.69,2024.68 4594.69,1906.3 4635.27,1865.71 4850.83,1865.71 4887.76,1902.64 R6.2 5121.32,1896.32 5318.68,1896.32 R7.2
PUMP1: IC1.29 R3.1 | length 2409.3
  Top Layer w10: v1(5910,2830) 5968.94,2888.94 IC1.29
  Bottom Layer w10: v1(5910,2830) 5910,2325 6053.93,2181.07 6062.22,2181.07 6154.25,2273.1 6154.25,2331.1 6168.9,2345.75 6271.1,2345.75 6285.75,2331.1 6285.75,2052.77 6238.13,2005.15 6238.13,1996.87 6535,1700 R3.1
PUMP1_OUT: "PUMPS AND SOL.4" D2.2 Q1.2 | length 2603.1
  Mid Layer 2 w80: D2.2 5046.14,1935 5095.39,1984.25 5595.52,1984.25 5791.27,2180 Q1.2 6220.29,2179.71 6241.55,2179.71 6305.75,2115.52 6305.75,2044.48 6070,1808.73 6070,1380
PUMP2: IC1.30 R5.1 | length 473.1
  Top Layer w20: R5.1 6018.94,2508.94 IC1.30
PUMP2_OUT: "PUMPS AND SOL.2" D3.2 Q2.2 | length 2938.9
  Mid Layer 2 w80: D3.2 4789.72,2375.75 5072.95,2375.75 5278.7,2170 Q2.2 5560.29,2170.29 5661.34,2170.29 5856.81,2365.75 6279.39,2365.75 6415,2230.14 6415,1978.86 6373.43,1937.29 6373.43,1752.8 6415,1711.22 6415,1449.41 6345.59,1380
SOL: IC1.28 R7.1 | length 791.6
  Top Layer w10: R7.1 5470.28,2515.98 5918.94,2964.65 IC1.28
SOL_OUT: "PUMPS AND SOL.6" D4.2 Q3.2 | length 2560.4
  Mid Layer 2 w80: D4.2 4667.33,2563.36 4667.33,2401.04 4574.69,2308.39 4574.69,2213.01 4626.99,2160.71 4700.96,2160.71 4717.63,2177.37 4792.41,2177.37 ; Q3.2 4859.71,2189.71 4792.41,2189.71 4574.69,1971.99 4574.69,1898.01 4626.99,1845.71 4824.29,1845.71 4893.43,1776.57 5464.65,1776.57 5794.41,1446.81 5794.41,1380
SSR: IC1.10 Q4.2 R11.1 | length 1343
  Top Layer w20: Q4.2 4866.57,3973.43 5310.74,3973.43 5369.16,3915 R11.1 5818.7,3908.66 5844.17,3908.66 6051.65,3701.17 6051.65,3694.53 6068.94,3677.24 IC1.10
SSR_OUT: "MOTOR AND SSR.4" Q4.3 | length 931.5
  Top Layer w20: Q4.3 4815,4434.51 4963.17,4582.68 5212.68,4582.68 5257.2,4538.15
TEST1: IC1.32 WT.5 | length 2758.2
  Top Layer w10: WT.5 4940.47,1241.42 4940.47,1779.83 5496.39,2335.75 5516.04,2335.75 5824.18,2643.89 5832.47,2643.89 5928.87,2547.49 5928.87,2504.05 5989.49,2443.43 6040.51,2443.43 6076.57,2479.49 6076.57,2656.85 6069.96,2663.46 6069.96,2865.67 6088.94,2884.65 6088.94,2934.65 6118.94,2964.65 IC1.32
TEST2: "extra esp32.2" IC1.33 | length 3554.6
  Top Layer w10: 4227.8,1371.85 4455.71,1371.85 4683.94,1143.62 4898.58,1143.62 4955.47,1200.52 4955.47,1607.55 5509.25,2161.33 5509.25,2314.89 5515.11,2320.75 5546.25,2320.75 5836.18,2610.68 5844.47,2610.68 5913.87,2541.27 5913.87,2497.83 5983.28,2428.43 6046.72,2428.43 6091.57,2473.28 6091.57,2663.06 6084.96,2669.68 6084.96,2859.46 6103.94,2878.43 6103.94,2899.65 6168.94,2964.65 IC1.33
WATER_TEMP: IC1.31 R10.1 WT.2 | length 5562.2
  Top Layer w20: WT.2 5435,1519.41 R10.1 5435,1838.8 5342.22,1931.57 5307.78,1931.57 4975.47,1599.27 4975.47,1192.23 4906.86,1123.62 4497.24,1123.62 4382.34,1238.51 4298.16,1238.51 4183.27,1353.41 4183.27,1390.29 4346.01,1553.03 4739.47,1553.03 4920.47,1734.04 4920.47,1788.12 5796.25,2663.89 5840.75,2663.89 5948.87,2555.77 5948.87,2512.33 5997.78,2463.43 6032.22,2463.43 6056.57,2487.78 6056.57,2648.56 6049.96,2655.18 6049.96,2897.95 6068.94,2916.93 IC1.31
pads on no net: "extra esp32.4" "extra esp32.5" "extra esp32.6" "MOTOR AND SSR.6" HX711_1.5 HX711_2.5 IC1.4 IC1.5 IC1.15 IC1.16 IC1.17 IC1.18 IC1.19 IC1.20 IC1.21 IC1.22 IC1.23 IC1.24 IC1.25 IC1.26 IC1.34 IC1.35 IC1.38 IC1.39 J8.4 J8.5 J8.6

## Polygon pours and split planes (outlines as drawn)
GND on Mid Layer 1 "GND Net" (solid, remove dead copper, pour order 6): 1000,1000 1000,5000 7000,5000 7000,1000

## Other copper
Mid Layer 1:
  pour cut-out: 6537.77,1770 7000,1770 7000,4345 6562.77,4345

## Silkscreen, mask and mechanical layers (free items; w line width, h text height)
Top Overlay:
  text "EN" at 5685,4795 h60
  text "ECEN 404 Pour Over 1" at 1205,4755 h60
  text "Designed by" at 1220,4609.99 h60
  text "Adam Jackson" at 1215,4455 h60
  text "3.3V" at 3895,3940 h60
  text "IO0" at 4975,2845 h60
  text "12V" at 3020,1615 h60
  text "5V" at 2570,1610 h60